# EAGLE board rain ALARM (EAGLE 6.5.0)
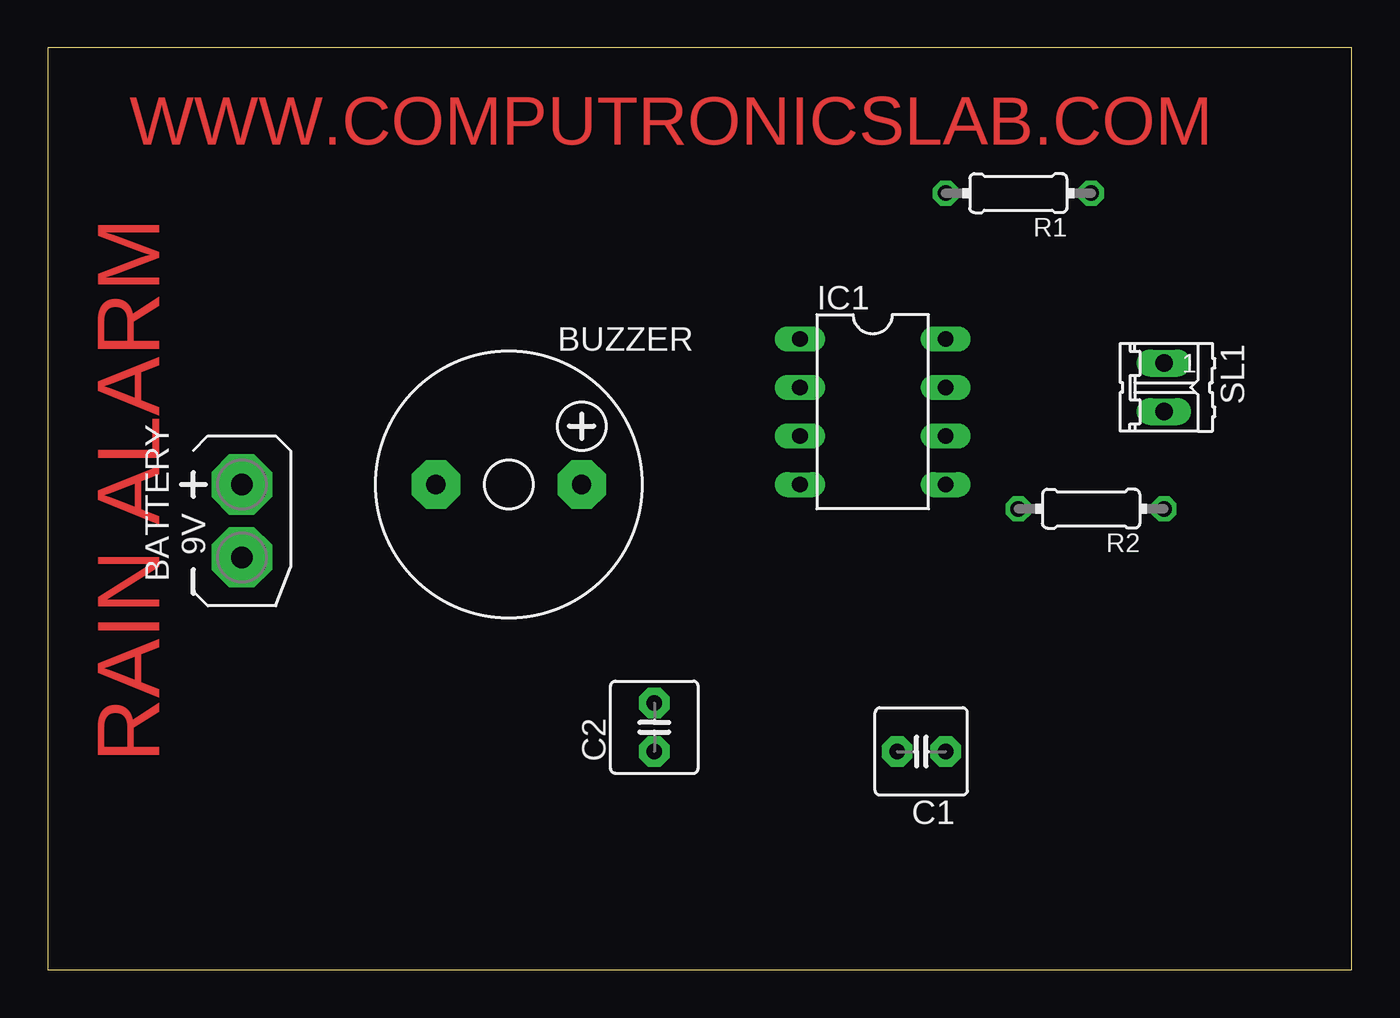
[diagram p0: board, top side]
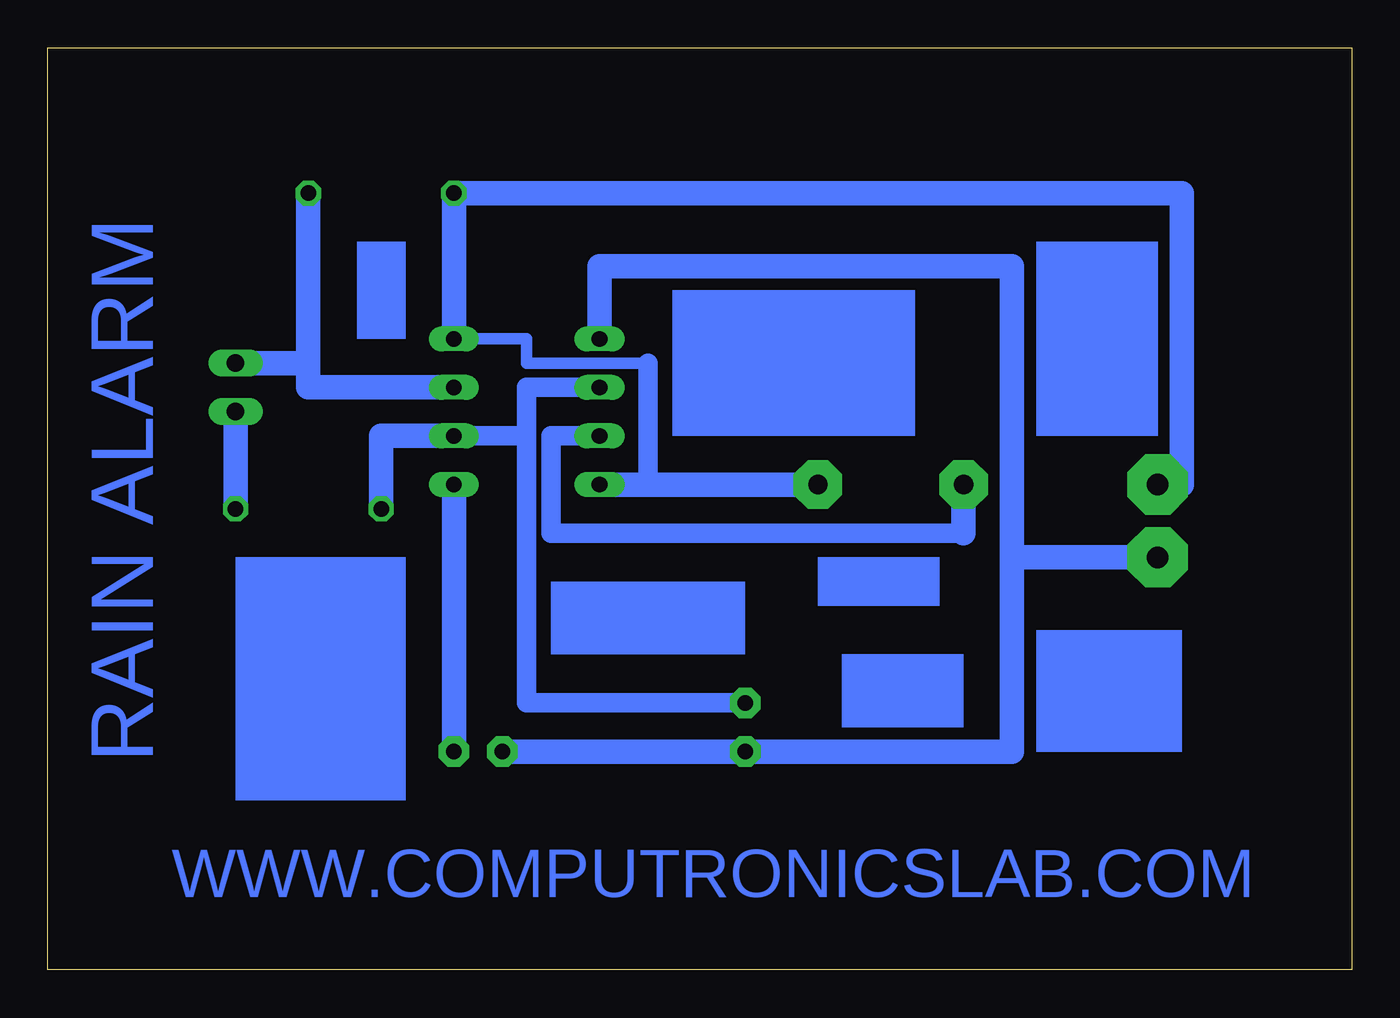
[diagram p1: board, bottom side, seen from below]

Size 68.25 x 48.25 mm. Coordinates in mm from the lower left corner, seen from the top.
Outline: 0,0 68.25,0 68.25,48.25 0,48.25 0,0
Copper layers (1*16): Top 0.035mm / dielectric 1.5mm / Bottom 0.035mm
Design rules "default": minimum track width 10mil, minimum drill 24mil, track to track 8mil, track to pad 8mil, pad to pad 8mil, via to via 8mil, smd to smd 8mil, copper to edge 40mil, drill to drill 8mil, minimum pad ring 10mil, minimum via ring 8mil, stop-mask expansion 4mil, vias tented up to drill 0mil, thermal gap 10mil

## Footprints (pad centres in the part's own frame; a part is rotated, then mirrored left to right if it is on the bottom)
AB9V = drill 1.118 pad 3.15 octagon: + 0,2.54; - 0,-1.27
F/CM12P = drill 1.016 pad 2.54 octagon: + 3.81,0; - -3.81,0
C2.5-5 = drill 0.813 pad 1.6 octagon: 1 -1.27,0; 2 1.27,0
DIL-08 = drill 0.813 long: 1 -3.81,-3.81; 2 -1.27,-3.81; 3 1.27,-3.81; 4 3.81,-3.81; 5 3.81,3.81; 6 1.27,3.81; 7 -1.27,3.81; 8 -3.81,3.81
0204/7 = drill 0.813 octagon: 1 -3.81,0; 2 3.81,0
02P = drill 0.914 long: 1 -1.27,0; 2 1.27,0

## Placement (x,y rotation side)
BATTERY  9V  [AB9V]  10.16,22.86 0 top
BUZZER  F/CM12P  [F/CM12P]  24.13,25.4 0 top
C1  0.01uf  [C2.5-5]  45.72,11.43 180 top
C2  0.01uf  [C2.5-5]  31.75,12.7 90 top
IC1  NE555  [DIL-08]  43.18,29.21 270 top
R1  1k  [0204/7]  50.8,40.64 180 top
R2  47k  [0204/7]  54.61,24.13 180 top
SL1  RAIN SENSOR  [02P]  58.42,30.48 270 top

## Library data of the parts
BATTERY = battery
BUZZER = buzzer; OC_FARNELL: unknown; OC_NEWARK: unknown
C1 C2 = capacitor-wima
IC1 = st-microelectronics; MF: Arrow Electronics; MPN: NE555N; OC_FARNELL: 1467742; OC_NEWARK: 89K1486
R1 R2 = eagle-ltspice; SPICEMODEL: NONE; SPICEPREFIX: R
SL1 = con-amp-quick; OC_FARNELL: unknown; OC_NEWARK: unknown

## Nets
N$1: BUZZER.- IC1.3
N$2: BATTERY.- C1.2 C2.1 IC1.1
N$3: IC1.7 R1.1 SL1.1
N$5: BATTERY.+ BUZZER.+ IC1.4 IC1.8 R1.2
N$6: C1.1 IC1.5
N$7: C2.2 IC1.2 IC1.6 R2.2
N$8: R2.1 SL1.2

## Tracks (layer width: path | path; a pad name or v marks a point on that pad's centre or on a via)
N$1
  Bottom 1.016: IC1.3 41.91,27.94 41.91,22.86 22.86,22.86 20.32,22.86
  Bottom 1.27: BUZZER.- 20.32,22.86
N$2
  Bottom 1.27: C1.2 C2.1 17.78,11.43 17.78,21.59 | IC1.1 39.37,36.83 17.78,36.83 17.78,21.59 | BATTERY.- 17.78,21.59
N$3
  Bottom 1.27: 54.61,31.75 54.61,30.48 IC1.7 | SL1.1 54.61,31.75 | 54.61,31.75 R1.1
N$5
  Bottom 0.61: 36.83,31.75 43.18,31.75 43.18,33.02 IC1.8
  Bottom 1.016: 36.83,31.75 36.83,25.4
  Bottom 1.27: BUZZER.+ 36.83,25.4 IC1.4 | IC1.8 R1.2 8.89,40.64 8.89,25.4 BATTERY.+
N$6
  Bottom 1.27: C1.1 IC1.5
N$7
  Bottom 1.016: 43.18,27.94 43.18,30.48 IC1.2 | IC1.6 43.18,27.94 | 43.18,27.94 43.18,13.97 C2.2
  Bottom 1.27: IC1.6 50.8,27.94 R2.2
N$8
  Bottom 1.27: SL1.2 R2.1
(copper drawn outside any net)
  shapes: Bottom area x8

## Text on the board
Top: WWW.COMPUTRONICSLAB.COM | RAIN ALARM
Bottom: RAIN ALARM | WWW.COMPUTRONICSLAB.COM